# Altium PCB linkit-v4-0.3_6layers_smdonly.PcbDoc (part 5 of 5)
Units mm, origin at the board's own origin, x right, y up, seen from the top; angles counter-clockwise.
Board outline 70 x 35 mm, 6 copper layers (Top Layer, Int1 (GND), Int2 (Sign), Int3 (Sign), Int4 (PWR), Bottom Layer), stack 1.636 mm thick; 199 components, 156 nets, 686 pads, 897 vias.
Unrouted connection lines stored in the file: 1.
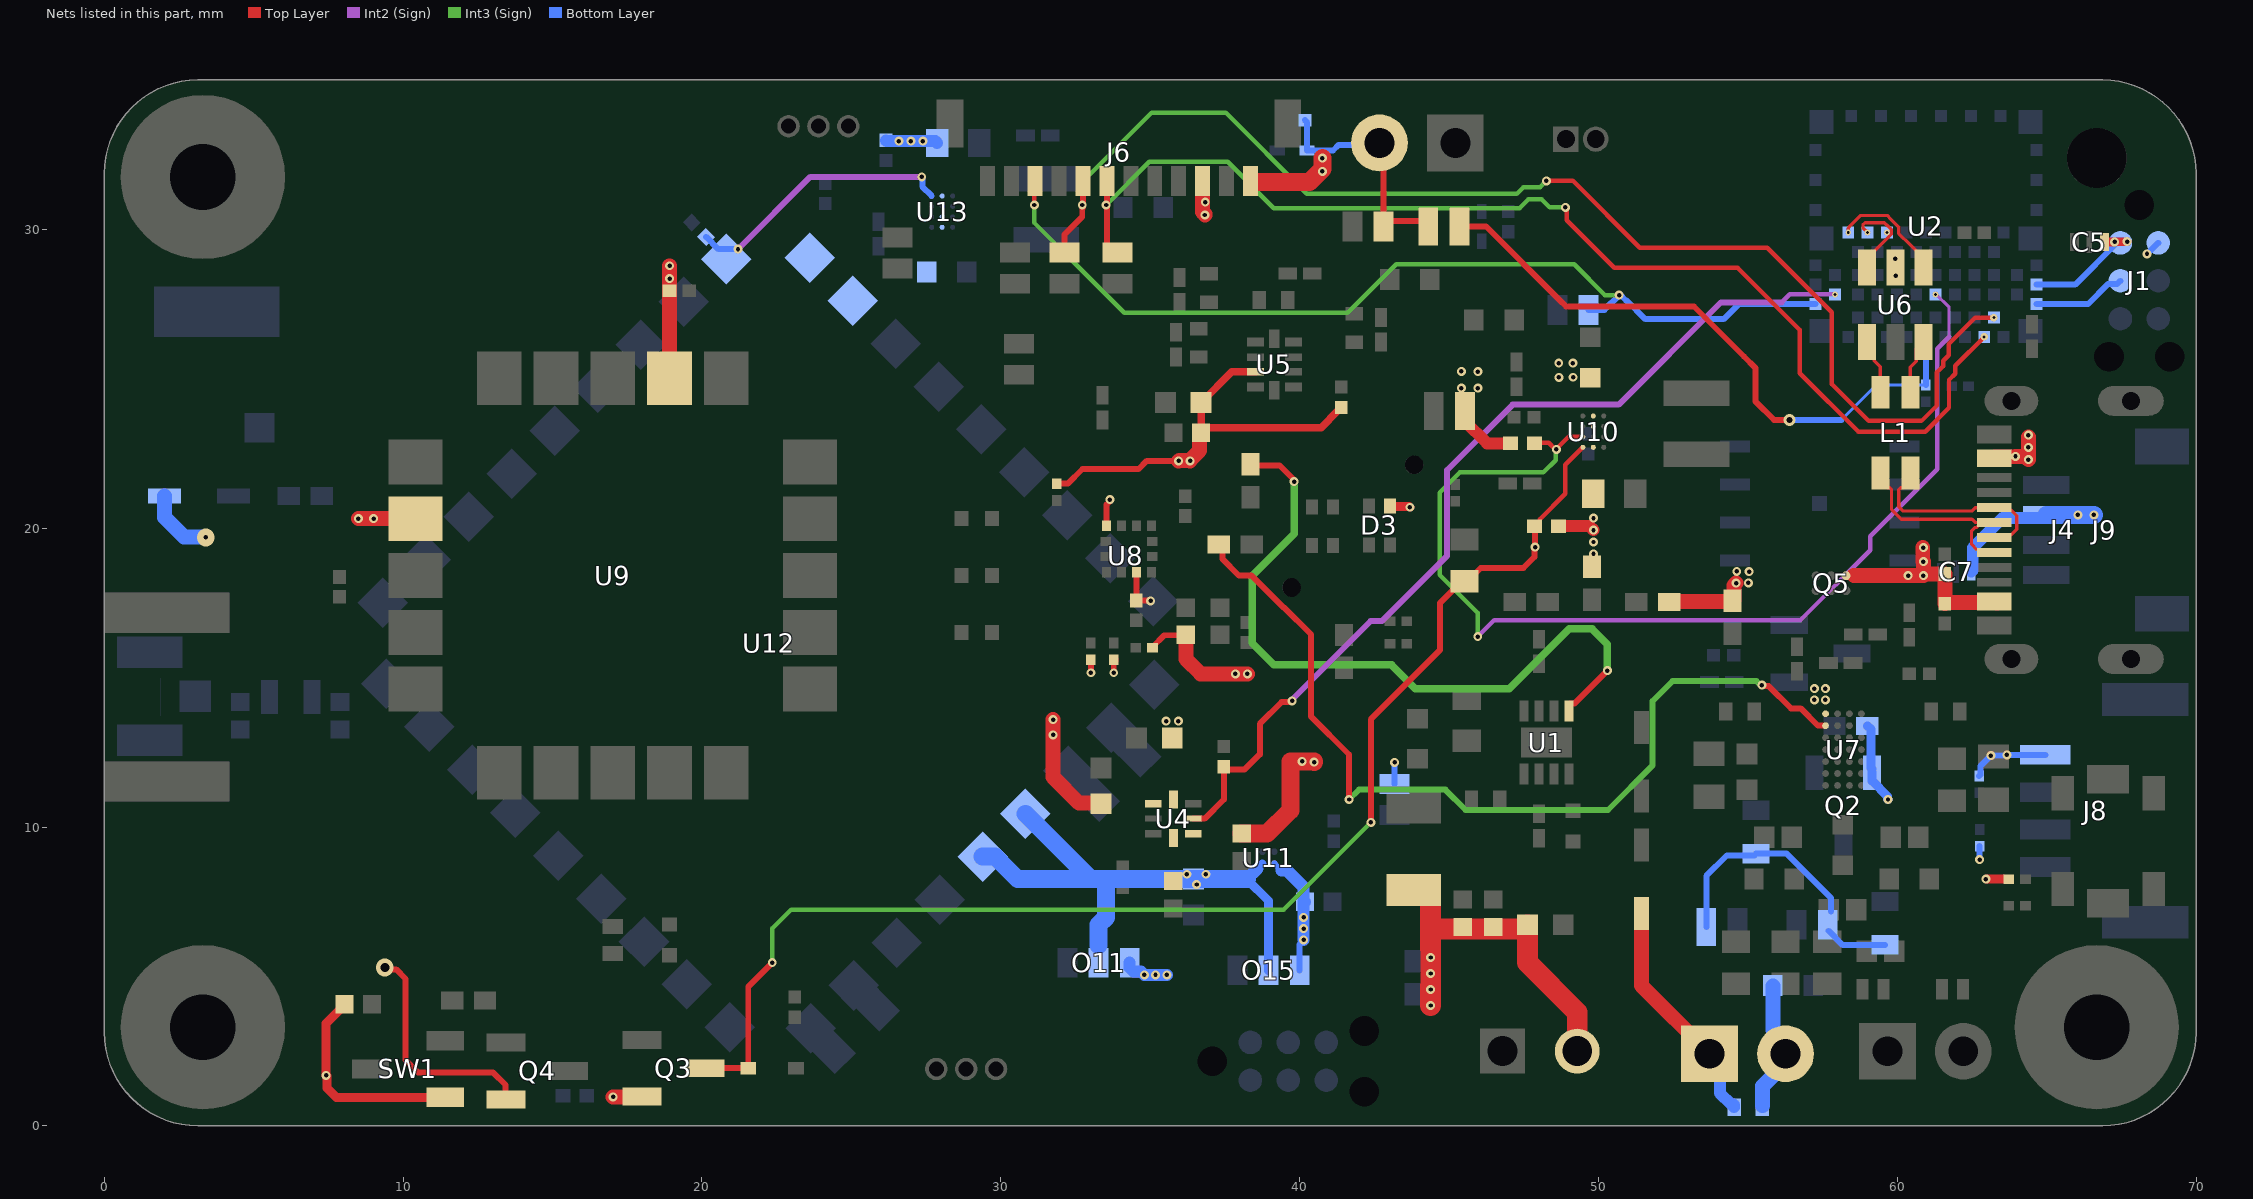
[diagram p8: the nets of this part, all layers, seen from the top]

## Via types
v1: diameter 0.4, hole 0.2, Int1 (GND) to Bottom Layer, tented both sides, 151 vias
v2: diameter 0.4, hole 0.2, Int1 (GND) to Int2 (Sign), tented both sides, 105 vias
v3: diameter 0.3, hole 0.15, Top Layer to Int1 (GND), tented both sides, 97 vias
v4: diameter 0.4, hole 0.2, Int1 (GND) to Int3 (Sign), tented both sides, 78 vias
v5: diameter 0.4, hole 0.2, Top Layer to Int1 (GND), tented both sides, 64 vias
v6: diameter 0.3, hole 0.15, Top Layer to Int4 (PWR), tented both sides, 63 vias
v7: diameter 0.3, hole 0.15, Top Layer to Int3 (Sign), tented both sides, 57 vias
v8: diameter 0.3, hole 0.15, Int1 (GND) to Bottom Layer, tented both sides, 50 vias
v9: diameter 0.4, hole 0.2, Top Layer to Bottom Layer, tented both sides, 40 vias
v10: diameter 0.3, hole 0.15, Int4 (PWR) to Bottom Layer, tented both sides, 17 vias
v11: diameter 0.3, hole 0.15, Int3 (Sign) to Bottom Layer, tented both sides, 17 vias
v12: diameter 0.3, hole 0.15, Top Layer to Int2 (Sign), tented both sides, 16 vias
v13: diameter 0.3, hole 0.15, Int2 (Sign) to Bottom Layer, tented both sides, 15 vias
v14: diameter 0.2, hole 0.1, Int3 (Sign) to Bottom Layer, tented both sides, 14 vias
v15: diameter 0.3, hole 0.15, Int1 (GND) to Int2 (Sign), tented both sides, 14 vias
v16: diameter 0.6, hole 0.15, Int1 (GND) to Bottom Layer, tented both sides, 13 vias
v17: diameter 0.5, hole 0.2, Top Layer to Bottom Layer, tented both sides, 12 vias
v18: diameter 0.2, hole 0.1, Int2 (Sign) to Bottom Layer, tented both sides, 11 vias
v19: diameter 0.3, hole 0.15, Int2 (Sign) to Int3 (Sign), tented both sides, 9 vias
v20: diameter 0.3, hole 0.15, Int1 (GND) to Int3 (Sign), tented both sides, 8 vias
v21: diameter 0.226, hole 0.1, Top Layer to Int3 (Sign), tented both sides, 6 vias
v22: diameter 0.25, hole 0.1, Int3 (Sign) to Bottom Layer, tented both sides, 5 vias
v23: diameter 0.3, hole 0.15, Top Layer to Bottom Layer, tented both sides, 5 vias
v24: diameter 0.25, hole 0.1, Int2 (Sign) to Bottom Layer, tented both sides, 5 vias
v25: diameter 0.25, hole 0.1, Top Layer to Bottom Layer, tented both sides, 5 vias
v26: diameter 0.2, hole 0.1, Top Layer to Bottom Layer, tented both sides, 3 vias
v27: diameter 0.6, hole 0.3, Top Layer to Bottom Layer, tented both sides, 3 vias
v28: diameter 0.6, hole 0.15, Top Layer to Int2 (Sign), tented both sides, 2 vias
v29: diameter 0.6, hole 0.15, Int3 (Sign) to Bottom Layer, tented both sides, 2 vias
v30: diameter 0.25, hole 0.1, Int1 (GND) to Bottom Layer, tented both sides, 2 vias
v31: diameter 0.2, hole 0.1, Int1 (GND) to Bottom Layer, tented both sides, 2 vias
v32: diameter 0.4, hole 0.2, Int2 (Sign) to Bottom Layer, tented both sides, 1 vias
v33: diameter 0.4, hole 0.2, Top Layer to Int2 (Sign), tented both sides, 1 vias
v34: diameter 0.169, hole 0.1, Int3 (Sign) to Bottom Layer, tented both sides, 1 vias
v35: diameter 0.6, hole 0.15, Int4 (PWR) to Bottom Layer, tented both sides, 1 vias
v36: diameter 0.25, hole 0.1, Int2 (Sign) to Int3 (Sign), tented both sides, 1 vias
v37: diameter 0.169, hole 0.1, Top Layer to Int2 (Sign), tented both sides, 1 vias

## Nets (pads, with @x,y where several pads share a name; then routed paths per layer and width w, separated by ;. In a path a pad name is that pad's centre, name@x,y a point inside that pad or via, vN(x,y) a via of type N, cw(c..) or ccw(c..) an arc to the next point about the centre after c; other vN are vias at no path point) (continued)
SPI_MISO: J6.8 O4.2 U2.33 | length 43.4
  Top Layer w0.15: v7(48.26,31.623) 49.149,31.623 51.384,29.388 55.649,29.388 57.813,27.224 57.813,24.824 59.048,23.589 60.81,23.589 61.327,24.105 61.327,25.213 61.538,25.424 61.538,25.598 61.722,25.782 61.722,26.162 62.609,27.049 v25(63.235,27.049)
  Top Layer w0.2: O4.2@32.131,29.223 32.131,29.825 32.728,30.422 v7(32.728,30.815) ; v7@32.754,30.724 J6.8@32.754,31.623
  Int3 (Sign) w0.15: v7(32.728,30.815) 32.728,31.585 35.052,33.909 37.529,33.909 40.242,31.195 47.275,31.195 47.493,31.413 48.047,31.413 48.257,31.623 v7(48.26,31.623)
SPI_MOSI: J6.7 O3.2 U2.34 | length 39.7
  Top Layer w0.15: v7(48.895,30.734) 48.938,30.691 48.938,30.309 50.527,28.72 54.656,28.72 56.742,26.634 56.742,25.745 56.742,25.189 58.702,23.229 60.933,23.229 61.731,24.027 61.731,24.96 61.942,25.171 61.942,25.431 v25(62.91,26.399)
  Top Layer w0.2: J6.7@33.554,31.623 33.554,30.815 33.554,29.453 33.784,29.223 O3.2@33.909,29.223
  Int3 (Sign) w0.15: v7(33.528,30.815) 34.97,32.257 37.593,32.257 39.139,30.711 47.362,30.711 47.66,31.009 48.098,31.009 48.373,30.734 v7(48.895,30.734)
SPI_NSS: J6.10 O1.2 U2.2 | length 31.7
  Top Layer w0.15: v7(31.128,30.815) 31.128,31.597 J6.10@31.154,31.623
  Int3 (Sign) w0.15: v7(31.128,30.815) 31.128,30.213 32.824,28.517 34.136,27.205 41.613,27.205 43.237,28.829 48.706,28.829 49.188,28.829 50.22,27.797 v11(50.694,27.797)
  Bottom Layer w0.2: O1.2@49.67,27.305 50.202,27.305 v11(50.694,27.797) ; v11@50.691,27.797 50.72,27.826 50.924,27.621 50.946,27.621 51.572,26.995 54.192,26.995 54.696,27.499 U2.2@57.26,27.499
SPV+: C56.1 D5.2 J15.1 | length 7.8
  Top Layer w0.5: D5.2@51.435,7.105 51.435,4.699 J15.1@53.721,2.413
  Bottom Layer w0.4: J15.1@53.721,2.413 54.067,2.067 54.067,1.097 54.439,0.725 54.514,0.725 54.539,0.7 C56.1@54.539,0.625
SPV-: C56.2 FB5.1 J15.2 | length 4.2
  Bottom Layer w0.5: C56.2@55.489,0.675 55.489,1.33 J15.2@56.261,2.101 ; FB5.1@55.84,4.674 55.84,3.213 56.261,2.792 J15.2@56.261,2.413
STAT_LED: R13.2 U1.5 | length 24.1
  Top Layer w0.2: R13.2@38.354,22.14 38.396,22.098 39.335,22.098 39.819,21.613 v7(39.819,21.559) ; U1.5@49.01,13.877 49.01,14.077 49.06,14.127 49.193,14.127 v7(50.298,15.232)
  Int3 (Sign) w0.254: v7(39.819,21.559) 39.819,19.819 38.413,18.413 38.413,16.151 39.139,15.425 43.075,15.425 43.868,14.632 47.017,14.632 49.022,16.637 49.784,16.637 50.298,16.123 v7(50.298,15.232)
SWDCLK: J1.4 U2.30 | length 3.1
  Bottom Layer w0.2: U2.30@64.66,27.499 66.383,27.499 67.048,28.164 67.354,28.164 J1.4@67.466,28.276
SWDIO: J1.2 U2.28 | length 3.4
  Bottom Layer w0.2: U2.28@64.66,28.149 65.953,28.149 67.351,29.546 J1.2@67.466,29.546
SWS: C3.2 O6.2 U2.40 | length 21
  Top Layer w0.2: O6.2@45.352,30.099 46.241,30.099 48.706,27.634 48.92,27.419 53.198,27.419 54.872,25.745 55.254,25.363 55.254,24.248 55.88,23.622 v9(56.388,23.622)
  Bottom Layer w0.1: 58.13,23.622 59.297,24.789 60.39,24.789 60.392,24.791 C3.2@60.96,24.791
  Bottom Layer w0.2: v9@56.416,23.622 58.13,23.622 ; C3.2@60.96,24.791 U2.40@60.96,26.399
SWS_IN: D8.1 J10.2 O6.1 O8.1 R60.1 | length 8.1
  Top Layer w0.2: J10.2@42.672,32.893 42.812,32.753 O8.1@42.812,30.281 ; O8.1@42.812,30.099 O8.1@42.812,30.243 ; O6.1@44.31,30.099 44.128,30.281 O8.1@42.812,30.281 ; O8.1@42.812,30.243 O8.1@42.812,30.281 ; O8.1@42.812,30.243 42.773,30.281 O8.1@42.812,30.281
  Bottom Layer w0.2: R60.1@40.177,33.655 40.251,33.581 D8.1@40.251,32.639 41.12,32.639 41.307,32.826 42.605,32.826 J10.2@42.672,32.893
USB_D_N: U2.10 U6.6 | length 3
  Top Layer w0.112: U6.6@58.985,28.728 59.229,28.972 59.229,29.273 59.794,29.838 59.794,29.996 59.691,30.099 ; v26(59.01,29.899) 58.851,30.058 58.851,30.15 58.927,30.226 59.563,30.226 59.69,30.099
USB_D_P: U2.8 U6.4 | length 3.9
  Top Layer w0.112: v26(58.36,29.899) 58.36,30.047 58.777,30.465 59.662,30.465 59.789,30.338 60.054,30.073 60.054,29.859 60.427,29.486 60.885,29.028 U6.4@60.885,28.728
USB_L_N: L1.3 U6.1 | length 1.9
  Top Layer w0.112: U6.1@58.985,26.228 59.229,25.984 59.229,25.745 59.229,25.607 59.436,25.4 L1.3@59.436,24.548
USB_L_P: L1.2 U6.3 | length 1.5
  Top Layer w0.112: L1.2@60.436,24.871 60.436,25.384 60.641,25.589 60.641,25.745 60.641,25.984 U6.3@60.885,26.228
USB_N: J4.A7 J4.B7 L1.4 | length 6.7
  Top Layer w0.112: L1.4@59.436,21.848 59.436,21.598 59.68,21.354 59.744,21.354 59.809,21.288 59.809,20.625 60.134,20.301 62.503,20.301 62.612,20.191 62.76,20.191 J4.A7@63.243,20.191 ; J4.A7@62.76,20.135 62.76,20.133 62.724,20.097 62.722,20.097 62.648,20.023 62.593,20.023 62.486,19.916 62.486,19.466 62.667,19.285 63.149,19.285 J4.B7@63.243,19.191
USB_P: J4.A6 J4.B6 L1.1 | length 7.4
  Top Layer w0.112: L1.1@60.436,21.848 60.436,21.598 60.192,21.354 60.113,21.354 60.048,21.288 60.048,20.724 60.198,20.574 62.495,20.574 62.612,20.691 J4.B6@63.243,20.691 ; 62.605,20.684 J4.B6@63.236,20.684 ; J4.A6@63.243,19.691 63.337,19.785 63.819,19.785 64,19.966 64,20.416 63.819,20.597 63.337,20.597 J4.B6@63.25,20.684
VADC_EN: R57.2 U2.3 U4.2 | length 31.8
  Top Layer w0.2: U4.2@36.449,10.279 36.822,10.279 37.465,10.922 37.465,11.928 R57.2@37.465,12.02 37.557,11.928 38.165,11.928 38.67,12.433 38.67,13.456 39.4,14.186 39.713,14.186 v12(39.751,14.224)
  Int2 (Sign) w0.15: 56.134,27.559 56.399,27.824 v18(57.91,27.824)
  Int2 (Sign) w0.2: v12(39.751,14.224) 39.751,14.268 42.374,16.891 42.755,16.891 44.941,19.077 44.941,21.949 47.129,24.137 50.68,24.137 54.102,27.559 56.134,27.559
VBAT: C1.1 C19.2 C20.1 C21.1 C22.1 C41.1 C48.1 J5.2 J6.3 O9.1 O11.3 Q2.2 Q3.2 R4.1 R8.2 R9.2 R55.2 R66.2 SW1.1 U10.A2 U13.A2 | length 30.7
  Top Layer w0.3: C1.1@8.049,4.047 8.042,4.047 7.899,3.904 7.899,3.897 7.43,3.428 v6(7.43,1.687) 7.449,1.668 7.449,1.275 7.769,0.955 SW1.1@11.41,0.955
  Top Layer w0.4: O9.1@45.533,23.583 46.279,22.837 R9.2@47.064,22.837 ; R8.2@48.66,20.066 49.708,20.066 v6(49.835,19.939)
  Top Layer w0.5: v6(17.031,0.971) Q3.2@17.968,0.971 ; J6.3@36.754,31.623 36.754,30.583 36.83,30.507 v6(36.83,30.48)
  Top Layer w0.7: C19.2@43.815,7.891 44.19,7.891 44.375,7.706 44.375,7.296 44.375,6.593 ; v6@44.382,4.029 v6@44.382,4.69 ; 44.382,6.593 44.382,5.924 44.388,5.917 v6(44.388,5.635) 44.388,5.099 44.388,4.697 v6@44.382,4.69 ; v6(44.385,4.564) 44.385,4.687 v6@44.382,4.69 ; 44.524,6.593 45.466,6.593 46.482,6.593 47.487,6.593 C22.1@47.625,6.731 47.625,5.461 49.292,3.794 J5.2@49.292,2.501
  Bottom Layer w0.3: R4.1@59,13.388 59.123,13.265 59.123,11.973 Q2.2@59.156,11.94 ; Q2.2@59.156,11.821 59.156,11.546 59.68,11.022 59.68,10.932 v10(59.69,10.922)
  Bottom Layer w0.4: R66.2@26.162,32.979 26.162,32.969 26.172,32.959 27.809,32.959 C48.1@27.875,32.893 ; O11.3@34.315,5.461 34.315,5.291 34.446,5.161 34.696,5.161 v10(34.804,5.053) v10(35.56,5.053)
  other v6: 44.383,4.029 44.387,5.099 49.835,19.137 49.835,19.538 49.835,20.34 45.413,24.684 45.965,24.684 45.417,25.248 45.965,25.236 36.844,30.909
  other v10: 35.179,5.051 26.591,32.956 26.992,32.956 27.392,32.956
VBAT_SENSE: O5.1 O7.1 R5.2 R6.2 | length 9.3
  Bottom Layer w0.2: O5.1@53.611,6.657 53.611,8.365 54.295,9.049 55.217,9.049 R6.2@55.275,9.107 56.298,9.107 57.785,7.62 O7.1@57.785,7.168 ; O7.1@57.702,6.53 58.181,6.051 R5.2@59.585,6.051
VBUS: C17.2 C18.2 J4.A4_B9 J4.B4_A9 Q5.A1 R35.1 R52.2 U2.12 U6.5 U7.G4 | length 11.5
  Top Layer w0.4: v3(59.936,29.017) 59.936,28.964 U6.5@59.944,28.956 ; J4.A4_B9@63.21,17.508 J4.A4_B9@63.243,17.541
  Top Layer w0.5: R52.2@52.366,17.526 52.387,17.547 R35.1@54.462,17.547 ; R35.1@54.483,17.568 R35.1@54.462,17.547 ; v6(54.61,18.161) 54.533,18.084 54.533,17.618 R35.1@54.462,17.547 ; 58.547,18.412 58.55,18.415 v6(60.364,18.415) ; v6@60.365,18.416 v6(60.871,18.415) ; v6@60.852,19.353 60.852,18.884 v6(60.871,18.884) v6@60.871,18.443 ; v6(60.871,18.415) 60.922,18.466 C18.2@61.595,18.466 C17.2@61.595,17.475 ; C17.2@61.628,17.508 J4.A4_B9@63.21,17.508 ; J4.B4_A9@63.243,22.341 63.293,22.391 63.942,22.391 v6(63.957,22.405) 64.281,22.405 v6(64.389,22.297) v6@64.389,23.047 ; J4.A4_B9@63.279,17.555 J4.A4_B9@63.342,17.491
  other v3: 59.944,28.448
  other v6: 57.224,14.258 57.595,14.258 57.224,14.629 57.595,14.629 55.015,18.171 54.629,18.554 55.04,18.548 60.871,19.353 64.389,22.706 64.389,23.114
  other v31: 59.66,29.899
VCC_SEL: R9.1 U2.52 U10.B3 | length 36.1
  Top Layer w0.15: R9.1@47.864,22.837 47.882,22.855 48.339,22.855 48.558,22.636 v7(48.596,22.636) 48.596,22.655 48.999,23.058 U10.B3@49.461,23.058
  Int2 (Sign) w0.1: v18@61.308,27.824 61.737,27.395 61.737,26.403
  Int2 (Sign) w0.15: v19(45.962,16.374) 46.515,16.928 56.762,16.928 59.097,19.262 59.097,19.727 61.341,21.971 61.341,25.745 61.341,26.006 61.737,26.403 ; v18(61.285,27.824) v18@61.308,27.824
  Int3 (Sign) w0.15: v19(45.962,16.374) 45.962,17.163 44.683,18.442 44.683,20.228 44.683,20.666 44.683,21.188 45.368,21.873 48.162,21.873 48.567,22.278 48.567,22.607 v7(48.596,22.636)
"VOUT_TPS63901 3V3&2V32": C50.1 U12.7 U12.8 U13.C2 U13.D2
VPA_EN: R67.2 U12.9 U13.A3 | length 9.2
  Int2 (Sign) w0.2: v13(21.209,29.337) 23.63,31.758 v13(27.358,31.758)
  Bottom Layer w0.2: R67.2@20.143,29.747 20.553,29.337 v13(21.209,29.337) ; v13(27.358,31.758) 27.377,31.739 27.377,31.668 27.379,31.666 27.379,31.431 U13.A3@27.691,31.119
VSENS_1: C8.1 C12.2 C13.1 R28.1 R29.2 R54.2 R56.2 U4.4 U5.8 | length 18.6
  Top Layer w0.2: R54.2@31.877,21.489 32.245,21.489 32.737,21.981 34.618,21.981 34.887,22.251 v6(35.956,22.251) ; R56.2@35.078,16.002 35.078,16.026 35.469,16.418 36.172,16.418 R29.2@36.195,16.441 ; C12.2@36.703,23.189 C12.2@36.705,23.191 ; R28.1@41.282,23.924 41.292,23.924 41.402,24.034 R28.1@41.402,24.044
  Top Layer w0.25: C12.2@36.705,23.191 C12.2@36.705,23.193 ; U5.8@38.521,25.228 37.726,25.228 C13.1@36.705,24.207 C12.2@36.705,23.193 ; R28.1@41.282,23.924 40.726,23.368 36.88,23.368 C12.2@36.705,23.193
  Top Layer w0.5: v6(35.956,22.251) 35.975,22.27 v6@36.331,22.27 ; R29.2@36.198,16.438 36.198,15.618 36.69,15.126 v6(37.849,15.126) v6(38.257,15.126) ; v6(36.339,22.251) 36.339,22.262 v6@36.331,22.27 ; C12.2@36.703,23.189 36.655,23.141 36.655,22.594 v6@36.331,22.27
  other v6: 35.536,13.544 35.944,13.544
VSENS_2: C10.1 C39.1 D4.2 U4.5 U9.2 U9.17 | length 11.9
  Top Layer w0.5: v6(8.509,20.32) 10.413,20.32 U9.2@10.418,20.315 ; U9.17@18.918,25.015 18.918,27.952 v6(18.918,28.782) ; v6(31.75,13.596) v6(31.75,13.081) 31.75,11.673 32.622,10.801 33.339,10.801 C10.1@33.361,10.779
  Bottom Layer w0.5: D4.2@2.023,21.074 2.023,20.36 2.671,19.712 3.38,19.712 v35(3.399,19.693)
  other v6: 9.017,20.32 18.918,28.35
VSYS: C5.1 C7.1 C9.2 C11.2 C38.2 C42.1 C45.2 D3.1 J1.1 J6.1 J8.1 J9.2 O13.1@43.18,11.443 O15.3 Q4.2 R1.2 R2.2 R16.2 R61.2 R62.1 U4.1 U4.8 U8.3 U8.10 U10.C2 U10.D2 U11.A2 | length 34.5
  Top Layer w0.2: v27(9.39,5.306) 9.459,5.238 9.77,5.238 10.091,4.917 10.091,2.197 10.496,1.792 13.009,1.792 13.428,1.373 13.428,0.903 Q4.2@13.441,0.89 ; v6(33.02,15.163) R1.2@33.02,15.595 ; U8.10@33.54,20.079 33.54,20.786 33.655,20.901 v6(33.655,20.955) ; R2.2@33.772,15.571 33.782,15.561 v6(33.782,15.163) ; U8.3@34.54,18.529 34.54,17.586 C38.2@34.537,17.582 34.545,17.573 35.008,17.573 v6(35.017,17.564) ; v6(67.273,29.579) v6@67.279,29.585 ; v6@67.685,29.585 v6(67.691,29.591)
  Top Layer w0.252: R2.2@33.772,15.571 33.772,15.585 R2.2@33.782,15.595 ; R16.2@63.554,8.255 R16.2@63.728,8.255
  Top Layer w0.3: R2.2@33.772,15.572 R2.2@33.788,15.589 ; D3.1@43.022,20.742 43.043,20.721 43.668,20.721 v6(43.688,20.701) ; v6@63.007,8.255 R16.2@63.554,8.255 ; C5.1@66.929,29.576 66.929,29.579 v6(67.273,29.579) ; v6@67.279,29.585 v6@67.685,29.585
  Top Layer w0.6: C9.2@38.06,9.779 38.913,9.779 39.691,10.557 39.691,12.199 v6(40.087,12.199) 40.491,12.199 v6(40.491,12.175) ; J6.1@38.404,31.582 40.334,31.582 40.767,32.015 v6(40.767,32.385)
  Bottom Layer w0.2: U11.A2@39.154,8.775 39.161,8.775 39.39,8.546 ; 39.58,8.475 39.58,8.546 ; O15.3@40.005,5.207 40.005,6.069 40.132,6.196 v10(40.132,6.223) ; O13.1@43.18,11.443 43.182,11.444 v10(43.182,12.164) ; R62.1@62.738,11.71 62.778,11.75 62.778,12.034 63.145,12.401 63.658,12.401 v10(63.668,12.411) 64.948,12.411 J8.1@64.952,12.416 ; v10(62.759,8.914) R61.2@62.759,9.359 R61.2@62.759,9.339 ; v10(68.356,29.18) 68.363,29.18 68.729,29.546 J1.1@68.736,29.546
  Bottom Layer w0.4: 39.39,8.546 39.58,8.546 40.132,7.994 40.132,7.541 C45.2@40.18,7.493 40.132,7.445 v10(40.132,6.979) v10(40.132,6.604) v10(40.132,6.223) ; C7.1@62.476,18.542 62.526,18.592 62.526,19.346 63.519,20.339 64.887,20.339 J9.2@64.987,20.439
  Bottom Layer w0.6: J9.2@64.987,20.439 v10@66.579,20.439
  other v6: 36.558,8.077 62.962,8.255 36.227,8.421 36.862,8.421 48.677,25.048 49.152,25.051 48.673,25.524 49.149,25.527 40.767,31.943
  other v10: 63.135,12.391 66.04,20.447 66.579,20.442
VSYS_EN: C44.1 D1.1 Q3.3 R8.1 U10.A3 | length 44.4
  Top Layer w0.15: R8.1@47.86,20.066 47.885,20.066 48.035,20.216 48.035,20.292 48.895,21.152 48.895,22.124 U10.A3@49.478,22.707
  Top Layer w0.2: Q3.3@20.1,1.93 D1.1@21.552,1.93 21.552,4.662 v7(22.355,5.465) ; v7(42.383,10.155) 42.383,13.606 44.696,15.919 44.696,17.492 45.427,18.223 45.617,18.223 46.063,18.669 47.49,18.669 47.862,19.04 47.862,19.351 v12(47.881,19.37) 47.87,19.381 47.87,20.056 R8.1@47.86,20.066
  Int3 (Sign) w0.15: v7(22.355,5.465) 22.355,6.607 22.987,7.239 39.467,7.239 v7(42.383,10.155)
VSYS_SMD: C29.1@36.449,8.255 O11.2 O15.2 U11.A1 U12.31 U12.32 | length 18.7
  Bottom Layer w0.274: 38.591,8.612 U11.A1@38.754,8.775
  Bottom Layer w0.3: 38.234,8.255 38.964,7.525 O15.2@38.964,5.207
  Bottom Layer w0.4: 38.234,8.255 38.591,8.612
  Bottom Layer w0.6: U12.31@29.391,9.009 29.816,9.009 30.569,8.255 33.019,8.255 ; U12.32@30.828,10.445 33.019,8.255 ; 33.274,6.044 33.274,6.731 33.521,6.978 33.521,8.255 ; 38.234,8.255 C29.1@36.449,8.255 33.521,8.255 ; 33.019,8.255 33.521,8.255
WIRELESS_NCHG_LED: R14.1 U7.F4 | length 30.6
  Top Layer w0.2: R14.1@37.296,19.457 37.414,19.339 37.414,18.974 37.973,18.415 38.395,18.415 39.458,17.352 39.476,17.352 40.386,16.442 40.386,13.696 41.656,12.426 v7(41.656,10.922) ; v7(55.474,14.751) 55.512,14.713 55.7,14.713 56.443,13.97 56.769,13.97 57.347,13.392 U7.F4@57.601,13.392
  Int3 (Sign) w0.2: v7(41.656,10.922) 41.987,11.253 44.877,11.253 45.559,10.572 50.323,10.572 51.816,12.065 51.816,14.219 52.482,14.885 55.286,14.885 55.419,14.751 v7(55.474,14.751)
pads on no net: J1.H1 J1.H2 J1.H3 J4.A8 J4.B8 J9.S1 J9.S2 J12.H1 J12.H2 J12.H3 MEC1.1 MEC1.2 MH1.0 Q5.B1 Q5.B2 U2.15 U2.59 U2.65 U2.66 U2.67 U2.68 U2.69 U2.70 U2.71 U2.72 U2.73 U2.74 U2.75 U2.76 U2.77 U2.78 U8. U8.4 U8.11 U12.11 U12.12

## Polygon pours and split planes (outlines as drawn)
GND on Bottom Layer (solid, pour order 7): 9.64,16.115 9.807,16.004 10.655,15.155 10.767,14.988 10.806,14.791 10.767,14.594 10.655,14.427 9.807,13.578 9.64,13.467 9.445,13.428 9.403,13.411 9.349,13.388 9.264,13.371 9.179,13.354 9.128,13.354 9.078,13.344 7.51,13.344 7.444,13.3 7.247,13.261 6.677,13.261 6.48,13.3 6.313,13.412 6.201,13.579 6.162,13.776 6.162,14.926 6.201,15.123 6.313,15.29 6.48,15.402 6.677,15.441 7.247,15.441 7.444,15.402 7.611,15.29 7.63,15.262 8.337,15.262 9.079,16.004 9.246,16.115 9.443,16.155
GND on Bottom Layer (solid, pour order 8): 6.014,15.402 6.181,15.29 6.293,15.123 6.332,14.926 6.332,13.776 6.293,13.579 6.181,13.412 6.014,13.3 5.817,13.261 5.247,13.261 5.05,13.3 4.893,13.405 4.325,13.405 4.284,13.378 4.087,13.339 3.585,13.339 3.574,13.337 2.524,13.337 2.327,13.376 2.16,13.488 2.048,13.655 2.009,13.852 2.009,14.902 2.048,15.099 2.16,15.266 2.327,15.378 2.524,15.417 3.443,15.417 3.447,15.418 4.087,15.418 4.284,15.379 4.368,15.323 4.931,15.323 5.05,15.402 5.247,15.441 5.817,15.441
GND on Bottom Layer "BOTGND" (solid, remove dead copper, pour order 4): 0,33.113 0,1.778 1.905,-0.127 67.945,-0.127 70.104,1.905 70,33.224 68.58,34.874 1.454,34.874
GND on Top Layer "TOPGND" (solid, remove dead copper, pour order 0): 0,2.032 1.651,0 68.143,0 70,1.858 70,33.142 68.081,35.061 1.506,35 0,33.274
GND on Int2 (Sign) "L2_GND" (solid, remove dead copper, pour order 2): 0.001,33.009 -0.108,1.924 1.817,0 68.072,0 70,2.113 70,33.332 68.326,35.052 1.723,35.001
GND on Int3 (Sign) "L3_GND" (solid, remove dead copper, pour order 3): 0,33.098 0,1.655 1.882,0 68.072,0 70,2.032 70,33.191 68.487,35.001 1.767,35
VBUS on Int4 (PWR) (split plane): 64.949,23.538 64.949,21.166 60.07,16.286 57.574,13.791 56.853,13.791 54.177,16.467 54.177,18.948 59.406,18.948 59.458,18.954 59.507,18.975 59.549,19.007 64.216,23.674 64.813,23.674
VSENS_1 on Int4 (PWR) (split plane): 37.957,21.574 38.66,20.871 38.66,15.656 38.66,14.562 37.989,13.89 37.957,13.859 37.925,13.817 37.905,13.768 37.898,13.716 37.898,12.584 37.416,12.102 36.184,12.102 35.076,13.209 35.076,13.827 35.994,14.744 36.001,14.747 36.043,14.779 36.075,14.821 36.095,14.87 36.102,14.922 36.102,17.63 36.102,17.631 36.095,17.683 36.075,17.731 36.043,17.773 35.524,18.292 35.524,22.912 36.619,22.912
VBAT on Int4 (PWR) (split plane): 28.098,33.316 28.098,32.1 28.105,32.048 28.125,31.999 28.157,31.957 28.761,31.353 28.803,31.321 28.852,31.301 28.904,31.294 38.524,31.294 43.727,26.092 43.769,26.06 43.817,26.04 43.87,26.033 45.945,26.033 49.455,22.522 49.455,21.717 49.455,21.665 49.462,21.613 49.482,21.564 49.514,21.522 50.682,20.354 50.682,15.407 48.244,12.97 48.212,12.928 48.192,12.879 48.185,12.827 48.185,11.176 48.192,11.124 48.212,11.075 48.244,11.033 49.006,10.271 49.048,10.239 49.097,10.219 49.149,10.212 57.15,10.212 57.202,10.219 57.251,10.239 57.293,10.271 58.377,11.355 60.504,11.355 60.504,10.922 60.504,9.482 58.258,7.235 49.705,7.235 49.653,7.228 49.605,7.208 49.563,7.176 45.831,3.445 45.799,3.403 45.779,3.354 45.772,3.302 45.772,0.511 6.933,0.511 6.933,2.71 7.463,3.24 9.686,3.24 9.738,3.247 9.787,3.267 9.829,3.299 11.916,5.386 31.115,5.386 31.167,5.393 31.216,5.413 31.22,5.417 40.543,5.417 40.596,5.424 40.644,5.444 40.686,5.476 46.117,10.906 46.149,10.948 46.169,10.997 46.176,11.049 46.176,13.886 47.641,15.351 48.086,15.797 48.118,15.839 48.139,15.888 48.146,15.94 48.146,17.334 48.139,17.386 48.118,17.435 48.086,17.477 48.05,17.505 48.022,17.542 45.541,20.023 45.541,22.225 45.534,22.277 45.514,22.326 45.482,22.368 44.339,23.511 44.297,23.543 44.248,23.563 44.196,23.57 42.816,23.57 37.543,28.843 37.501,28.875 37.452,28.895 37.4,28.902 26.784,28.902 25.502,30.184 25.502,33.116 25.984,33.598 27.816,33.598
VSENS_2 on Int4 (PWR) (split plane): 32.383,17.37 32.383,12.983 32.174,12.775 31.072,12.775 30.174,13.673 30.174,16.032 30.167,16.084 30.147,16.132 30.115,16.174 18.841,27.448 18.799,27.48 18.751,27.5 18.699,27.507 17.907,27.507 17.855,27.5 17.806,27.48 17.764,27.448 10.398,20.082 9.977,19.661 9.381,19.661 9.328,19.654 9.28,19.634 9.238,19.601 8.888,19.252 0.51,19.252 0.51,21.561 0.719,21.769 8.89,21.769 8.942,21.776 8.991,21.796 9.033,21.828 16.975,29.77 19.982,29.77
VSYS on Int4 (PWR) (split plane): 254 vertices, not listed, extent 0.509,0.509 69.491,34.491
VBUS on Int1 (GND) (split plane): 60.13,30.095 60.123,30.043 60.123,29.555 60.13,29.503 60.15,29.454 60.182,29.412 60.377,29.217 60.377,28.448 60.377,25.897 60.384,25.845 60.404,25.796 60.436,25.754 62.723,23.467 62.765,23.435 62.814,23.415 62.866,23.408 64.753,23.408 65.053,23.108 65.053,21.841 63.062,21.841 59.13,25.773 59.13,29.623 59.123,29.675 59.103,29.724 59.071,29.765 59.03,29.797 59.03,30.099 60.132,30.099
AGND on Int1 (GND) (split plane): 42.814,29.037 42.814,27.859 41.191,26.237 36.66,26.237 36.465,26.432 35.762,27.135 35.762,28.872 36.406,29.516 42.334,29.516
PGND1 on Int1 (GND) (split plane): 48.498,27.289 48.54,27.257 48.589,27.237 48.641,27.23 51.097,27.23 52.122,26.205 52.122,25.608 51.757,25.243 51.725,25.201 51.705,25.152 51.698,25.1 51.698,22.427 51.705,22.375 51.725,22.326 51.757,22.284 52.122,21.919 52.122,20.658 51.763,20.298 47.17,20.298 46.247,21.221 46.247,26.912 47.201,27.865 47.922,27.865
PGND1 on Int1 (GND) (split plane): 32.056,34.49 32.056,33.442 29.932,31.317 29.9,31.275 29.88,31.227 29.873,31.174 29.873,27.858 29.394,27.38 26.119,27.38 24.84,28.659 24.84,29.634 25.571,30.366 25.603,30.408 25.624,30.457 25.63,30.509 25.63,31.029 29.091,34.49
GND on Int1 (GND) (split plane): 3.125,34.49 28.52,34.49 25.286,31.256 25.254,31.214 25.234,31.165 25.227,31.113 25.227,30.592 24.495,29.861 24.463,29.819 24.443,29.77 24.436,29.718 24.436,28.575 24.443,28.523 24.463,28.474 24.495,28.432 25.892,27.035 25.934,27.003 25.983,26.983 26.035,26.976 29.478,26.976 29.53,26.983 29.579,27.003 29.621,27.035 30.217,27.632 30.249,27.674 30.269,27.722 30.276,27.774 30.276,31.091 32.401,33.215 32.433,33.257 32.439,33.271 32.453,33.306 32.46,33.358 32.46,34.49 51.943,34.49 51.943,30.099 58.826,30.099 58.826,29.797 58.785,29.765 58.753,29.724 58.733,29.675 58.726,29.623 58.726,25.689 58.733,25.637 58.753,25.589 58.785,25.547 62.835,21.497 62.877,21.465 62.926,21.445 62.978,21.438 65.255,21.438 65.307,21.445 65.355,21.465 65.397,21.497 65.429,21.539 65.449,21.587 65.456,21.639 65.456,23.192 65.449,23.244 65.429,23.293 65.397,23.334 64.979,23.752 64.937,23.785 64.889,23.805 64.837,23.812 62.95,23.812 60.781,25.98 60.781,28.448 60.781,29.301 60.774,29.353 60.754,29.402 60.722,29.443 60.526,29.639 60.526,30.043 60.52,30.093 60.525,30.099 69.49,30.099 69.49,3.125 69.491,3.113 69.482,2.92 69.452,2.691 69.402,2.466 69.333,2.247 69.245,2.034 69.138,1.829 69.015,1.635 68.874,1.452 68.718,1.282 68.548,1.126 68.366,0.986 68.171,0.862 67.967,0.755 67.754,0.667 67.534,0.598 67.309,0.548 67.08,0.518 66.885,0.509 66.875,0.51 3.125,0.511 3.115,0.51 2.92,0.518 2.691,0.548 2.466,0.598 2.247,0.668 2.034,0.756 1.829,0.862 1.635,0.986 1.452,1.126 1.282,1.282 1.126,1.452 0.986,1.635 0.862,1.829 0.755,2.034 0.667,2.247 0.598,2.467 0.548,2.692 0.518,2.92 0.509,3.115 0.51,3.126 0.51,3.301 0.51,3.304 0.51,31.875 0.509,31.885 0.518,32.081 0.548,32.309 0.598,32.534 0.667,32.754 0.756,32.967 0.862,33.171 0.986,33.366 1.126,33.549 1.282,33.719 1.452,33.874 1.635,34.015 1.829,34.139 2.034,34.245 2.247,34.333 2.466,34.403 2.691,34.453 2.92,34.483 3.113,34.491

## Other copper
Top Layer:
  rectangle net VSYS: 36.035,7.898 37.105,8.584
  rectangle net VBUS: 54.438,18.012 55.189,18.703
  region net VSYS: 35.773,9.681 35.773,9.532 35.923,9.381 35.923,8.699 36.073,8.549 36.073,8.13 35.474,8.13 35.474,8.558 35.623,8.707 35.623,9.689
  region net VSENS_1: 35.778,10.88 35.778,11.03 35.627,11.18 35.627,11.863 35.395,12.095 35.395,12.827 35.395,13.753 36.085,13.753 36.085,12.647 36.085,12.012 35.927,11.855 35.923,10.873
  region net VSENS_2: 35.099,10.779 34.837,11.041 34.377,11.041 34.29,11.128 33.419,11.128 33.419,10.7 33.69,10.429 34.146,10.429 34.405,10.688 34.957,10.688
  region net VSYS: 36.455,9.78 36.581,9.654 37.041,9.654 37.214,9.481 38.136,9.481 38.136,9.859 37.916,10.078 37.197,10.078 37.023,9.904 36.65,9.904
  pour cut-out: 46.863,24.765 46.848,24.75 46.848,23.542 49.699,23.542 49.655,24.765
  pour cut-out: 58.551,18.875 56.999,18.875 56.999,17.464 58.531,17.464
  pour cut-out: 59.759,14.039 59.781,14.017 59.781,11.669 56.769,11.669 56.769,14.017
  region net NetC58_1: 46.468,11.237 47.421,12.115 47.575,12.115 47.633,11.443 46.906,10.593 46.455,10.593
  pour cut-out: 54.582,23.895 52.337,23.895 52.337,23.232 52.474,23.095 54.582,23.095
  region net VSYS: 49.911,23.4 49.911,23.801 49.911,24.205 50.074,24.368 50.074,25.29 49.285,25.623 49.227,25.681 48.499,25.681 48.499,25.458 48.499,25.235 48.499,24.938 49.05,24.788 49.167,24.754 49.455,24.501 49.746,24.211 49.746,23.4
  region net PGND4: 47.777,13.325 47.776,13.326 46.121,13.326 45.97,13.175 46.023,13.123 46.023,12.546 46.028,12.546 46.244,12.331 47.724,12.331
  region net NetC2_2: 47.498,13.589 47.169,13.918 45.793,13.918 45.793,14.17 45.909,14.608 47.388,14.608 47.631,14.365 47.631,13.709
  region net NetC23_1: 57.514,11.702 57.988,11.702 58.001,11.896 57.58,11.896 56.854,11.896 56.388,11.43 56.388,7.747 57.377,6.902 57.785,6.985 57.514,7.469 57.023,7.874 57.023,11.176 57.111,11.442 57.331,11.662
  region net GND: 57.938,13.857 58.089,14.008 58.089,14.672 58.149,14.732 58.877,14.732 58.877,14.357 58.486,13.966 58.45,13.832 58.402,13.751 58.402,13.792 58.204,13.892 58.024,13.787
  region net VBAT: 45.402,24.319 45.212,24.55 45.212,25.4 46.162,25.4 46.162,24.625 45.855,24.319
  region net "LX2_TPS63901 3V3&2V31": 50.178,23.836 50.678,24.178 51.689,24.511 52.196,24.929 52.447,24.929 52.592,24.201 51.245,23.727 50.808,23.707 50.178,23.678
  pour cut-out: 51.943,30.099 51.943,35.306 69.85,35.306 69.85,30.226 69.977,30.099
  region net COIL-2: 58.867,11.703 58.405,11.709 58.396,11.903 58.822,11.903 59.548,11.903 60.014,11.436 60.014,7.753 58.895,6.9 58.617,6.991 58.822,7.5 59.379,7.88 59.379,11.182 59.291,11.448 59.071,11.668
  region net "LX1_TPS63901 3V3&2V31": 50.177,22.632 50.658,22.309 51.741,22.19 52.201,22.068 52.502,22.085 52.62,22.89 51.98,22.894 51.279,22.828 51.056,22.791 50.397,22.791 50.177,22.791
  region net VBAT: 49.747,22.71 49.745,22.707 49.745,22.258 49.454,21.967 49.454,18.711 50.202,18.711 50.202,21.963 49.912,22.254 49.912,22.705
  region net VBUS: 57.513,13.775 57.066,14.222 57.066,14.792 57.823,14.792 57.823,14.075 57.694,13.946 57.694,13.768
  region net VBUS: 58.557,18.661 58.312,18.661 58.166,18.506 58.142,18.393 58.144,18.393 58.241,18.268 58.453,18.167 58.537,18.163
  region net RX-OUT: 58.805,12.496 58.802,12.493 56.062,12.493 55.672,12.102 54.703,12.102 54.703,12.182 55.314,12.793 56.803,12.793 56.905,12.691 58.809,12.691 58.801,12.682 58.801,12.592
  region net PGND3: 57.705,11.441 58.891,11.441 58.891,10.068 58.459,9.636 57.951,9.636 57.51,10.076 57.51,11.364
Int2 (Sign):
  pour cut-out: -0.013,15.334 0.003,15.319 2.67,15.319 2.879,15.109 2.883,15.113 4.191,15.113 4.191,15.087 4.271,15.007 5.101,15.007 5.224,15.13 7.446,15.13 7.446,14.958 7.463,14.94 8.471,14.94 9.441,15.911 10.574,14.779 10.574,14.769 10.539,14.769 9.454,13.684 9.407,13.731 9.329,13.731 9.265,13.666 7.394,13.666 7.301,13.574 7.296,13.579 5.02,13.579 4.878,13.721 4.831,13.674 0.001,13.674
  pour cut-out: 51.943,30.099 51.943,35.306 69.85,35.306 69.85,30.226 69.977,30.099
Int3 (Sign):
  pour cut-out: -0.027,15.332 -0.011,15.316 2.655,15.316 2.865,15.106 2.868,15.11 4.177,15.11 4.177,15.084 4.256,15.005 5.087,15.005 5.209,15.127 7.431,15.127 7.431,14.955 7.449,14.938 8.456,14.938 9.427,15.908 10.559,14.776 10.559,14.766 10.524,14.766 9.439,13.681 9.392,13.728 9.315,13.728 9.25,13.664 7.379,13.664 7.287,13.571 7.282,13.576 5.005,13.576 4.863,13.718 4.816,13.671 -0.014,13.671
  region net NetC23_1: 54.86,6.815 54.502,6.457 53.054,7.941 53.518,8.169
  pour cut-out: 51.943,30.099 51.943,35.306 69.85,35.306 69.85,30.226 69.977,30.099
Bottom Layer:
  rectangle net NetC49_2: 3.447,13.854 4.087,14.903
  pour cut-out: 6.477,15.126 6.476,15.125 5.817,15.125 5.817,13.577 5.818,13.576 6.477,13.576
  pour cut-out: 5.893,15.11 5.958,15.067 6.001,15.002 6.016,14.926 6.016,13.776 6.001,13.7 5.958,13.635 5.893,13.592 5.817,13.577 5.247,13.577 5.171,13.592 5.106,13.635 5.063,13.7 5.059,13.722 4.233,13.722 4.228,13.714 4.163,13.671 4.087,13.655 3.585,13.655 3.574,13.653 2.524,13.653 2.448,13.668 2.383,13.711 2.34,13.776 2.325,13.852 2.325,14.902 2.34,14.978 2.383,15.043 2.448,15.086 2.524,15.101 3.443,15.101 3.447,15.102 4.087,15.102 4.163,15.086 4.228,15.043 4.253,15.006 5.066,15.006 5.106,15.067 5.171,15.11 5.247,15.125 5.817,15.125
  pour cut-out: 9.519,15.823 9.583,15.78 10.432,14.932 10.475,14.867 10.49,14.791 10.475,14.715 10.432,14.65 9.583,13.802 9.519,13.759 9.443,13.744 9.396,13.753 9.359,13.728 9.287,13.698 9.117,13.664 9.098,13.664 9.078,13.661 7.404,13.661 7.388,13.635 7.323,13.592 7.247,13.577 6.677,13.577 6.601,13.592 6.536,13.635 6.493,13.7 6.478,13.776 6.478,14.926 6.493,15.002 6.536,15.067 6.601,15.11 6.677,15.125 7.247,15.125 7.323,15.11 7.388,15.067 7.431,15.002 7.442,14.945 8.468,14.945 9.302,15.78 9.367,15.823 9.443,15.838
  region net "LX1_TPS63901 3V3&2V32": 28.387,31.04 28.49,31.06 30.634,31.297 30.634,31.944 30.462,32.116 30.287,32.116 29.806,31.826 28.865,31.7 28.331,31.166
  region net "LX2_TPS63901 3V3&2V32": 28.419,30.131 28.522,30.111 30.494,30.07 30.465,29.221 30.018,29.225 29.616,29.41 28.927,29.519 28.363,30.006
  region net "VOUT_TPS63901 3V3&2V32": 25.273,27.559 25.446,27.559 25.568,27.681 27.131,27.681 27.836,28.386 27.836,29.142 28.105,29.455 28.125,30.07 28.122,30.427 27.96,30.427 27.953,30.064 27.936,29.921 27.805,29.776 26.479,28.513 24.847,28.513 24.703,28.369
  region net "VOUT_TPS63901 3V3&2V32": 23.241,29.21 24.765,27.686 25.146,28.067 23.749,29.464 23.495,29.464
  region net VBAT: 27.984,31.083 27.904,31.256 27.889,31.307 27.813,31.496 27.775,31.577 27.775,31.913 27.51,32.177 27.51,32.48 28.214,32.48 28.252,32.442 28.252,31.539 28.13,31.288 28.122,31.123
  pour cut-out: 6.707,13.576 6.247,13.576 6.247,15.126 6.707,15.126
  pour cut-out: 2.54,15.367 2.54,13.335 0.508,13.335 0.508,15.367
  pour cut-out: 51.943,30.099 51.943,35.306 69.85,35.306 69.85,30.226 69.977,30.099
  pour cut-out: 57.46,26.472 64.587,26.472 64.587,29.572 64.46,29.699 57.46,29.699
Int1 (GND) (plane layer: these items are gaps in the copper):
  pour cut-out: 51.943,30.099 51.943,35.306 69.85,35.306 69.85,30.226 69.977,30.099
  lines w0.2: 58.928,29.623 58.928,30.48 59.055,30.607 59.309,30.607 60.579,30.607 60.579,30.297 60.325,30.043
  lines w0.4: 58.928,29.623 58.928,25.689 62.978,21.639 65.255,21.639 65.255,23.192 64.837,23.61 62.866,23.61 60.579,25.897 60.579,28.448 60.579,29.301 60.325,29.555 60.325,30.043 ; 24.638,28.575 26.035,27.178 29.478,27.178 30.074,27.774 30.074,31.174 32.258,33.358 32.258,34.925 29.241,34.925 25.429,31.113 25.429,30.509 24.638,29.718 24.638,28.575 ; 35.56,27.051 36.322,26.289 36.576,26.035 41.275,26.035 43.016,27.776 43.016,29.12 42.418,29.718 36.322,29.718 35.56,28.956 35.56,27.051 ; 46.045,21.138 47.087,20.096 51.846,20.096 52.324,20.574 52.324,22.003 51.9,22.427 51.9,25.1 52.324,25.524 52.324,26.289 51.181,27.432 48.641,27.432 48.006,28.067 47.117,28.067 46.045,26.995 46.045,21.138
Int4 (PWR) (plane layer: these items are gaps in the copper):
  region: 58.404,22.328 56.404,22.328 56.404,19.328 58.404,19.328
  region: 57.277,30.48 57.277,24.556 65.024,24.556 65.024,25.908 65.024,30.353
  pour cut-out: 51.943,30.099 51.943,35.306 69.85,35.306 69.85,30.226 69.977,30.099
  pour cut-out: -0.381,16.38 11.916,16.386 11.916,14.627 11.916,13.357 11.916,12.827 11.916,12.573 11.916,12.319 -0.381,12.319
  lines w0.4: 6.223,0 6.731,0 6.731,2.794 7.379,3.442 9.686,3.442 11.832,5.588 31.115,5.588 ; 31.145,5.618 36.035,5.618 38.896,5.618 40.543,5.618 45.974,11.049 45.974,13.97 47.498,15.494 47.944,15.94 47.944,17.334 ; 45.974,-0.064 45.974,3.302 49.705,7.033 58.341,7.033 60.706,9.398 60.706,10.922 60.706,11.557 58.293,11.557 57.15,10.414 51.943,10.414 49.149,10.414 48.387,11.176 48.387,12.827 50.884,15.324 50.884,20.438 49.657,21.665 ; 47.879,17.399 45.339,19.939 45.339,22.225 44.196,23.368 42.732,23.368 37.4,28.7 26.7,28.7 25.3,30.1 25.3,33.2 25.9,33.8 27.9,33.8 28.3,33.4 28.3,32.1 28.904,31.496 36.068,31.496 38.608,31.496 43.87,26.234 46.029,26.234 49.657,22.606 ; 38.1,12.5 37.5,11.9 36.1,11.9 34.875,13.125 34.875,13.911 35.886,14.922 35.9,14.922 35.9,17.631 35.322,18.208 35.322,23.114 35.814,23.114 36.703,23.114 38.1,21.717 38.862,20.955 38.862,15.656 38.862,14.478 38.132,13.748 38.1,13.716 38.1,12.5 ; 38.1,12.5 38.1,12.5 ; 49.657,21.665 49.657,21.717 49.657,22.606 ; 49.657,21.665 49.657,22.606 ; 0.254,19.05 8.972,19.05 9.381,19.459 10.061,19.459 10.541,19.939 17.907,27.305 18.699,27.305 29.972,16.032 29.972,13.589 30.988,12.573 32.258,12.573 32.585,12.9 32.585,17.453 20.066,29.972 16.891,29.972 8.89,21.971 2.032,21.971 0.635,21.971 0.254,21.59 0.254,19.05 ; 53.975,16.383 53.975,19.149 59.406,19.149 64.133,23.876 64.897,23.876 65.151,23.622 65.151,21.082 60.213,16.144 57.658,13.589 56.769,13.589 53.975,16.383

## Silkscreen, mask and mechanical layers (free items; w line width, h text height)
Top Overlay:
  drawing of 108 lines, arcs and shapes, not listed
  text "-" at 41.346,34.946 h0.8 r180
  text "+" at 47.446,34.779 h0.8 r180
  text "1" at 39.266,30.122 h1
  text "Argos Linkit V4.0 (SMD)" at 5.969,7.493 h2
  text "Reed switch" at 8.001,4.826 h1
  text "UART GPS" at 24.123,3.295 h0.8
  text "-" at 62.3,0.1 h0.8
  text "-" at 56.4,0 h0.8
  text "+" at 52.454,-0.213 h1
  text "+" at 59.254,-0.213 h1
Bottom Overlay:
  circle w0.254: c37.973,16.51 r0.115
  lines w0.15: 51.96,34.486 51.96,30.094 56.731,30.094 ; 65.189,30.094 67.308,30.094 ; 67.624,30.094 68.578,30.094 ; 68.894,30.094 69.925,30.094
  text "SAT UART" at 21.978,32.505 h0.8
  text "+" at 46.254,3.7 h1.52
  text "-" at 48.854,3.692 h1.52
Bottom Paste:
  rectangle: 3.4,13.852 4.126,14.902
Mechanical 3:
  drawing of 366 lines, arcs and shapes, not listed
  text "Layer" at 4.036,102.362 h1.52
  text "Name" at 10.405,102.362 h1.52
  text "Material" at 26.639,102.362 h1.52
  text "Thickness" at 38.636,102.362 h1.52
  text "Constant" at 47.723,102.362 h1.52
  text "Board Layer Stack" at 56.138,102.362 h1.52
  text "Top Overlay" at 10.405,99.314 h1.52
  text "Top Solder" at 10.405,96.266 h1.52
  text "SM-003" at 26.639,96.266 h1.52
  text "0.025mm" at 38.636,96.266 h1.52
  text "4" at 47.723,96.266 h1.52
  text "Top Surface Finish" at 10.405,93.218 h1.52
  text "Nickel, Gold" at 26.639,93.218 h1.52
  text "0.004mm" at 38.636,93.218 h1.52
  text "1" at 4.036,90.17 h1.52
  text "Top Layer" at 10.405,90.17 h1.52
  text "CF-004" at 26.639,90.17 h1.52
  text "0.035mm" at 38.636,90.17 h1.52
  text "Dielectric 1" at 10.405,87.122 h1.52
  text "S1000-2MB" at 26.639,87.122 h1.52
  text "0.050mm" at 38.636,87.122 h1.52
  text "4.25" at 47.723,87.122 h1.52
  text "Dielectric 2" at 10.405,84.074 h1.52
  text "S1000-2MB" at 26.639,84.074 h1.52
  text "0.050mm" at 38.636,84.074 h1.52
  text "4.25" at 47.723,84.074 h1.52
  text "2" at 4.034,81.026 h1.52
  text "Int1 (GND)" at 10.405,81.026 h1.52
  text "CF-004" at 26.639,81.026 h1.52
  text "0.018mm" at 38.636,81.026 h1.52
  text "Dielectric 3" at 10.405,77.978 h1.52
  text "S1000-2MB" at 26.639,77.978 h1.52
  text "0.050mm" at 38.636,77.978 h1.52
  text "4.25" at 47.723,77.978 h1.52
  text "Dielectric 4" at 10.405,74.93 h1.52
  text "S1000-2MB" at 26.639,74.93 h1.52
  text "0.050mm" at 38.636,74.93 h1.52
  text "4.25" at 47.723,74.93 h1.52
  text "3" at 4.036,71.882 h1.52
  text "Int2 (Sign)" at 10.405,71.882 h1.52
  text "CF-004" at 26.639,71.882 h1.52
  text "0.035mm" at 38.636,71.882 h1.52
  text "Dielectric 5" at 10.405,68.834 h1.52
  text "Core-001-HCC" at 26.639,68.834 h1.52
  text "1.065mm" at 38.636,68.834 h1.52
  text "4.25" at 47.723,68.834 h1.52
  text "4" at 4.036,65.786 h1.52
  text "Int3 (Sign)" at 10.405,65.786 h1.52
  text "CF-004" at 26.639,65.786 h1.52
  text "0.035mm" at 38.636,65.786 h1.52
  text "Dielectric 6" at 10.405,62.738 h1.52
  text "S1000-2MB" at 26.639,62.738 h1.52
  text "0.050mm" at 38.636,62.738 h1.52
  text "4.25" at 47.723,62.738 h1.52
  text "Dielectric 7" at 10.405,59.69 h1.52
  text "S1000-2MB" at 26.639,59.69 h1.52
  text "0.050mm" at 38.636,59.69 h1.52
  text "4.25" at 47.723,59.69 h1.52
  text "5" at 4.036,56.642 h1.52
  text "Int4 (PWR)" at 10.405,56.642 h1.52
  text "CF-004" at 26.639,56.642 h1.52
  text "0.018mm" at 38.636,56.642 h1.52
  text "Dielectric 8" at 10.405,53.594 h1.52
  text "S1000-2MB" at 26.639,53.594 h1.52
  text "0.050mm" at 38.636,53.594 h1.52
  text "4.25" at 47.723,53.594 h1.52
  text "Dielectric 9" at 10.405,50.546 h1.52
  text "S1000-2MB" at 26.639,50.546 h1.52
  text "0.050mm" at 38.636,50.546 h1.52
  text "4.25" at 47.723,50.546 h1.52
  text "6" at 4.036,47.498 h1.52
  text "Bottom Layer" at 10.405,47.498 h1.52
  text "CF-004" at 26.639,47.498 h1.52
  text "0.035mm" at 38.636,47.498 h1.52
  text "Bottom Surface Finish" at 10.405,44.45 h1.52
  text "Nickel, Gold" at 26.639,44.45 h1.52
  text "0.004mm" at 38.636,44.45 h1.52
  text "Bottom Solder" at 10.405,41.402 h1.52
  text "SM-003" at 26.639,41.402 h1.52
  text "0.025mm" at 38.636,41.402 h1.52
  text "4" at 47.723,41.402 h1.52
  text "Bottom Overlay" at 10.405,38.354 h1.52
Mechanical 8:
  lines w0.254: 4.826,-0.762 40.326,-0.762 40.326,34.738 4.826,34.738 4.826,-0.762
Mechanical 12:
  lines w0.1: 0,3.301 0,3.126 ccw(c3.15,3.151) 3.125,0 66.875,0 ccw(c66.85,3.15) 70,3.125 70,6.425 70,31.875 ccw(c66.85,31.85) 66.875,35.001 ; 0,3.302 0,31.875 cw(c3.15,31.85) 3.125,35.001 ; 3.125,35 66.875,35
Drill Drawing:
  drawing of 158 lines, arcs and shapes, not listed
  text "Symbol" at 83.197,89.036 h1.83
  text "Count" at 89.318,89.036 h1.83
  text "Hole Size" at 94.642,89.036 h1.83
  text "Plated" at 106.195,89.036 h1.83
  text "Hole Type" at 111.613,89.036 h1.83
  text "Drill Layer Pair" at 119.35,89.036 h1.83
  text "Via/Pad" at 133.685,89.036 h1.83
  text "Pad Shape" at 140.081,89.036 h1.83
  text "Template" at 148.333,89.036 h1.83
  text "Description" at 164.208,89.036 h1.83
  text "Hole Tolerance (+)" at 172.502,89.036 h1.83
  text "Hole Tolerance (-)" at 185.181,89.036 h1.83
  text "Hole Length" at 197.528,89.036 h1.83
  text "Routed Path Length" at 208.997,89.036 h1.83
  text "1" at 89.318,85.928 h1.52
  text "2.000mm (78.74mil)" at 94.642,85.928 h1.52
  text "NPTH" at 106.195,85.928 h1.52
  text "Round" at 111.613,85.928 h1.52
  text "Top Layer - Bottom Layer" at 119.35,85.928 h1.52
  text "Pad" at 133.685,85.928 h1.52
  text "Rounded" at 140.081,85.928 h1.52
  text "c200hn200m200" at 148.333,85.928 h1.52
  text "-" at 197.528,85.928 h1.52
  text "-" at 208.997,85.928 h1.52
  text "2" at 89.318,82.82 h1.52
  text "0.600mm (23.62mil)" at 94.642,82.82 h1.52
  text "PTH" at 106.195,82.82 h1.52
  text "Round" at 111.613,82.82 h1.52
  text "Top Layer - Bottom Layer" at 119.35,82.82 h1.52
  text "Pad" at 133.685,82.82 h1.52
  text "(Mixed)" at 140.081,82.82 h1.52
  text "(Mixed)" at 148.333,82.82 h1.52
  text "-" at 197.528,82.82 h1.52
  text "-" at 208.997,82.82 h1.52
  text "2" at 89.318,79.712 h1.52
  text "0.600mm (23.62mil)" at 94.642,79.712 h1.52
  text "PTH" at 106.195,79.712 h1.52
  text "Slot" at 111.613,79.712 h1.52
  text "Top Layer - Bottom Layer" at 119.35,79.712 h1.52
  text "Pad" at 133.685,79.712 h1.52
  text "Rounded" at 140.081,79.712 h1.52
  text "r180_100h60_140r50m0mx0" at 148.333,79.712 h1.52
  text "1.400mm (55.12mil)" at 197.528,79.712 h1.52
  text "0.800mm (31.50mil)" at 208.997,79.712 h1.52
  text "2" at 89.318,76.604 h1.52
  text "0.600mm (23.62mil)" at 94.642,76.604 h1.52
  text "PTH" at 106.195,76.604 h1.52
  text "Slot" at 111.613,76.604 h1.52
  text "Top Layer - Bottom Layer" at 119.35,76.604 h1.52
  text "Pad" at 133.685,76.604 h1.52
  text "Rounded" at 140.081,76.604 h1.52
  text "r220_100h60_180r50m0mx0" at 148.333,76.604 h1.52
  text "1.800mm (70.87mil)" at 197.528,76.604 h1.52
  text "1.200mm (47.24mil)" at 208.997,76.604 h1.52
  text "2" at 89.318,73.496 h1.52
  text "0.620mm (24.41mil)" at 94.642,73.496 h1.52
  text "NPTH" at 106.195,73.496 h1.52
  text "Round" at 111.613,73.496 h1.52
  text "Top Layer - Bottom Layer" at 119.35,73.496 h1.52
  text "Pad" at 133.685,73.496 h1.52
  text "Rounded" at 140.081,73.496 h1.52
  text "c62hn62m42p0" at 148.333,73.496 h1.52
  text "-" at 197.528,73.496 h1.52
  text "-" at 208.997,73.496 h1.52
  text "3" at 89.318,70.388 h1.52
  text "0.300mm (11.81mil)" at 94.642,70.388 h1.52
  text "PTH" at 106.195,70.388 h1.52
  text "Round" at 111.613,70.388 h1.52
  text "Top Layer - Bottom Layer" at 119.35,70.388 h1.52
  text "Via" at 133.685,70.388 h1.52
  text "Rounded" at 140.081,70.388 h1.52
  text "v60h30m0mx0" at 148.333,70.388 h1.52
  text "-" at 197.528,70.388 h1.52
  text "-" at 208.997,70.388 h1.52
  text "3" at 89.318,67.28 h1.52
  text "2.200mm (86.61mil)" at 94.642,67.28 h1.52
  text "PTH" at 106.195,67.28 h1.52
  text "Round" at 111.613,67.28 h1.52
  text "Top Layer - Bottom Layer" at 119.35,67.28 h1.52
  text "Pad" at 133.685,67.28 h1.52
  text "Rounded" at 140.081,67.28 h1.52
  text "c550h220m0mx0" at 148.333,67.28 h1.52
  text "-" at 197.528,67.28 h1.52
  text "-" at 208.997,67.28 h1.52
  text "4" at 89.318,64.172 h1.52
  text "0.100mm (3.94mil)" at 94.642,64.172 h1.52
  text "PTH" at 106.195,64.172 h1.52
  text "Round" at 111.613,64.172 h1.52
  text "Top Layer - Bottom Layer" at 119.35,64.172 h1.52
  text "Via" at 133.685,64.172 h1.52
  text "Rounded" at 140.081,64.172 h1.52
  text "(Mixed)" at 148.333,64.172 h1.52
  text "-" at 197.528,64.172 h1.52
  text "-" at 208.997,64.172 h1.52
  text "4" at 89.318,61.064 h1.52
  text "0.100mm (3.94mil)" at 94.642,61.064 h1.52
  text "PTH" at 106.195,61.064 h1.52
  text "Round" at 111.613,61.064 h1.52
  text "Top Layer - Bottom Layer" at 119.35,61.064 h1.52
  text "Via" at 133.685,61.064 h1.52
  text "Rounded" at 140.081,61.064 h1.52
  text "(Mixed)" at 148.333,61.064 h1.52
  text "-" at 197.528,61.064 h1.52
  text "-" at 208.997,61.064 h1.52
  text "5" at 89.318,57.956 h1.52
  text "0.150mm (5.91mil)" at 94.642,57.956 h1.52
  text "PTH" at 106.195,57.956 h1.52
  text "Round" at 111.613,57.956 h1.52
  text "Top Layer - Bottom Layer" at 119.35,57.956 h1.52
  text "Via" at 133.685,57.956 h1.52
  text "Rounded" at 140.081,57.956 h1.52
  text "v30h15m0mx0" at 148.333,57.956 h1.52
  text "-" at 197.528,57.956 h1.52
  text "-" at 208.997,57.956 h1.52
  text "6" at 89.318,54.848 h1.52
  text "0.500mm (19.69mil)" at 94.642,54.848 h1.52
  text "PTH" at 106.195,54.848 h1.52
  text "Round" at 111.613,54.848 h1.52
  text "Top Layer - Bottom Layer" at 119.35,54.848 h1.52
  text "Pad" at 133.685,54.848 h1.52
  text "Rounded" at 140.081,54.848 h1.52
  text "c75h50m0mx0" at 148.333,54.848 h1.52
  text "-" at 197.528,54.848 h1.52
  text "-" at 208.997,54.848 h1.52
  text "6" at 89.318,51.74 h1.52
  text "0.991mm (39.02mil)" at 94.642,51.74 h1.52
  text "NPTH" at 106.195,51.74 h1.52
  text "Round" at 111.613,51.74 h1.52
  text "Top Layer - Bottom Layer" at 119.35,51.74 h1.52
  text "Pad" at 133.685,51.74 h1.52
  text "Rounded" at 140.081,51.74 h1.52
  text "c65hn99m0mx0" at 148.333,51.74 h1.52
  text "-" at 197.528,51.74 h1.52
  text "-" at 208.997,51.74 h1.52
  text "8" at 89.318,48.631 h1.52
  text "1.000mm (39.37mil)" at 94.642,48.631 h1.52
  text "PTH" at 106.195,48.631 h1.52
  text "Round" at 111.613,48.631 h1.52
  text "Top Layer - Bottom Layer" at 119.35,48.631 h1.52
  text "Pad" at 133.685,48.631 h1.52
  text "(Mixed)" at 140.081,48.631 h1.52
  text "(Mixed)" at 148.333,48.631 h1.52
  text "-" at 197.528,48.631 h1.52
  text "-" at 208.997,48.631 h1.52
  text "52" at 89.318,45.523 h1.52
  text "0.200mm (7.87mil)" at 94.642,45.523 h1.52
  text "PTH" at 106.195,45.523 h1.52
  text "Round" at 111.613,45.523 h1.52
  text "Top Layer - Bottom Layer" at 119.35,45.523 h1.52
  text "Via" at 133.685,45.523 h1.52
  text "Rounded" at 140.081,45.523 h1.52
  text "(Mixed)" at 148.333,45.523 h1.52
  text "-" at 197.528,45.523 h1.52
  text "-" at 208.997,45.523 h1.52
  text "Slot definitions :" at 83.197,43.348 h1.52
  text "Routed Path Length" at 91.758,43.348 h1.52
  text "= Calculated from tool start centre position to tool end centre position." at 102.323,43.348 h1.52
  text "Hole Length" at 91.758,42.105 h1.52
  text "= Routed Path Length + Tool Size = Slot length as defined in the PCB layout" at 98.467,42.105 h1.52

## Text inside footprints (layer, text, board x,y; h text height)
J13: Mechanical 10 "Edge of PCB" at -0.825,12.351 h0.8 r270